# EAGLE board Serial-7-Segment-Shield-Panel-v10 (EAGLE 6.4)
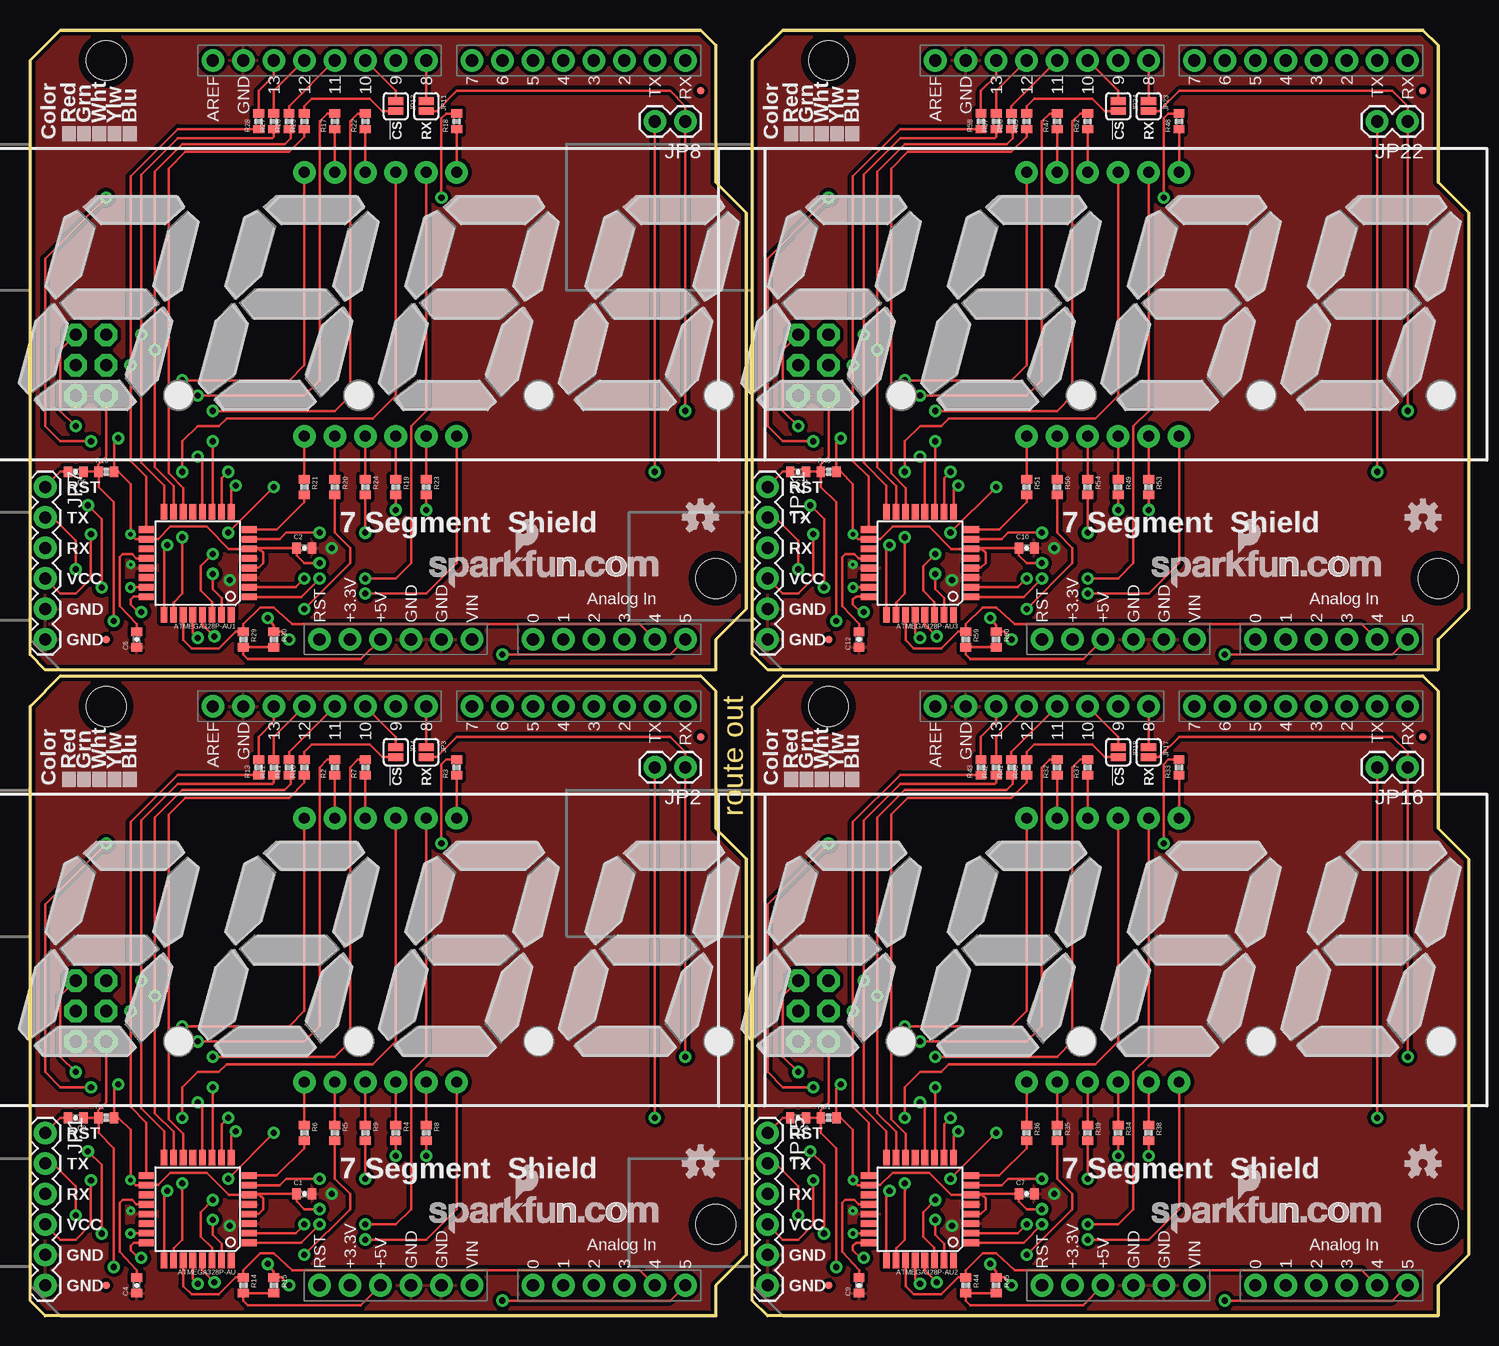
[diagram p0: board, top side]
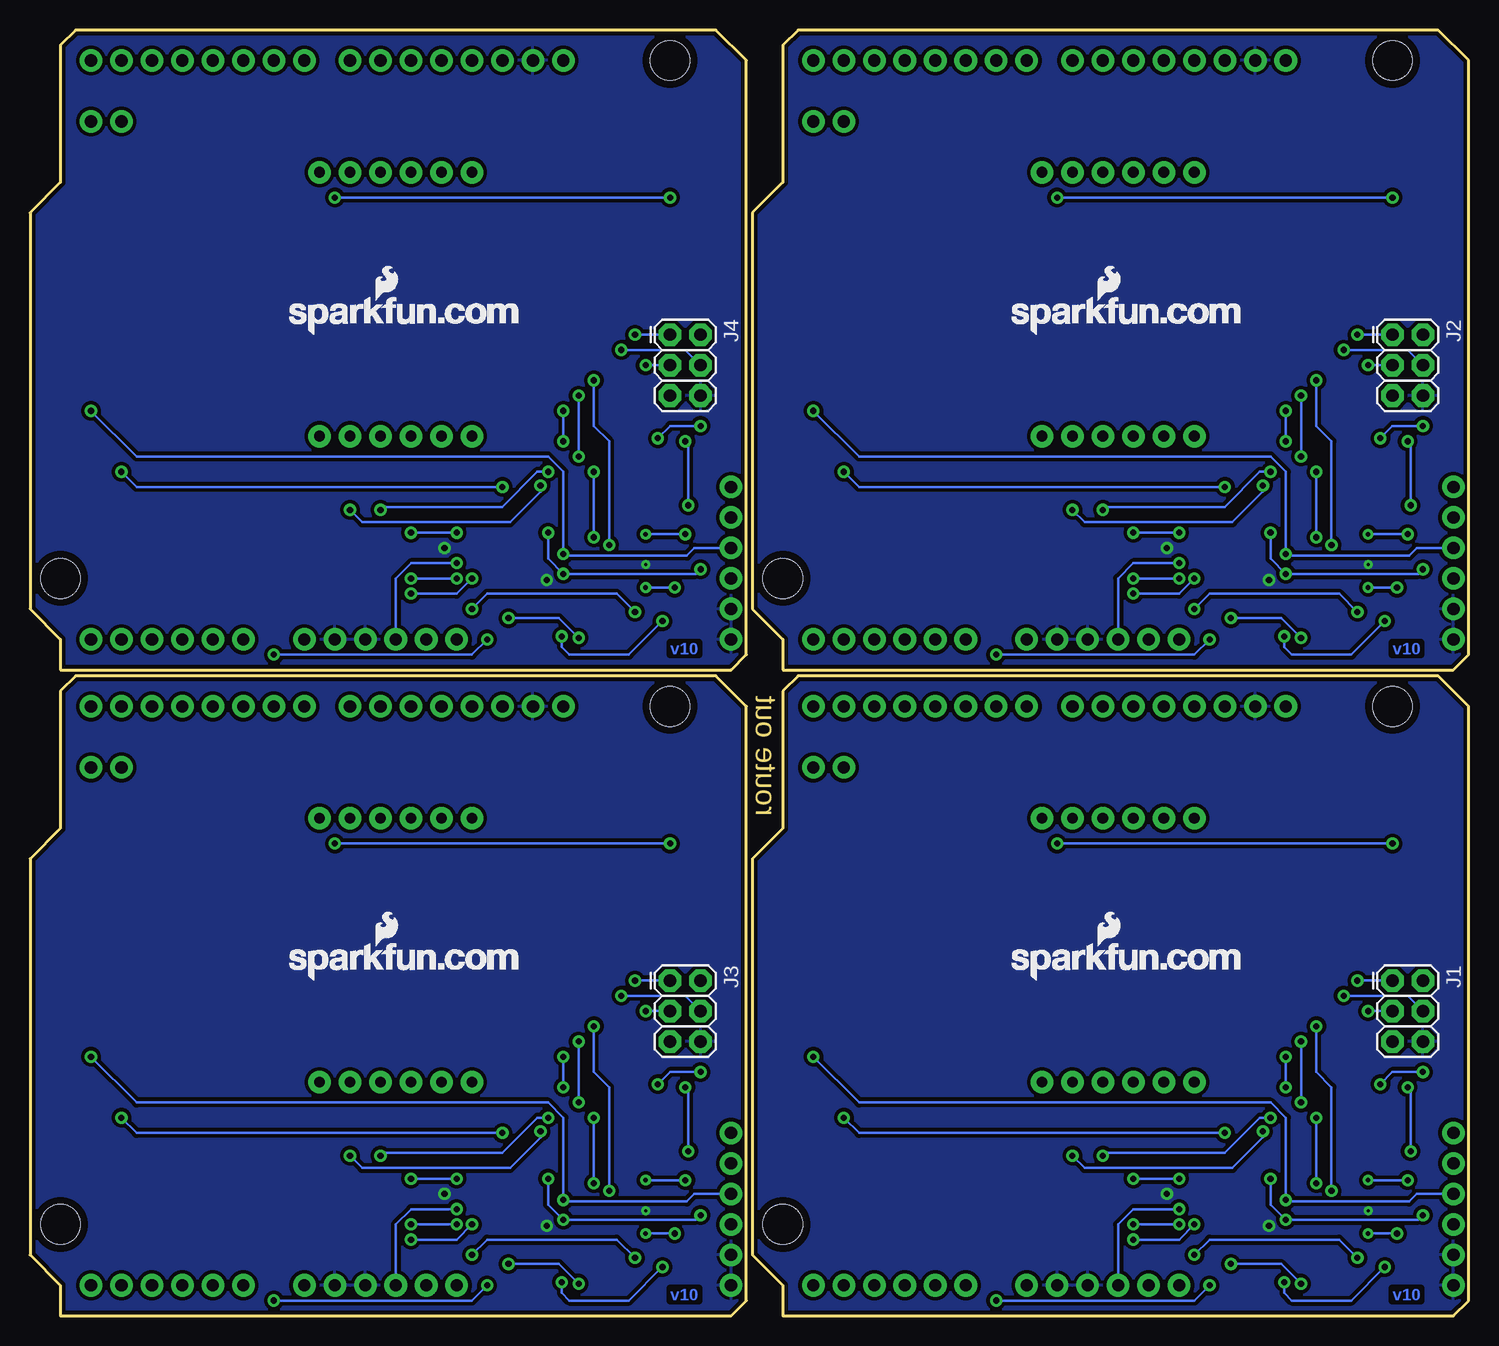
[diagram p1: board, bottom side, seen from below]

Size 119.89 x 107.19 mm. Coordinates in mm from the lower left corner, seen from the top.
Outline: 0,1.27 0,50.8 2.54,53.34 55.88,53.34 57.15,52.07 57.15,40.64 59.69,38.1 59.69,5.08 57.15,2.54 57.15,0 1.27,0 0,1.27
Outline: 0,55.12 0,104.65 2.54,107.19 55.88,107.19 57.15,105.92 57.15,94.49 59.69,91.95 59.69,58.93 57.15,56.39 57.15,53.85 1.27,53.85 0,55.12
Outline: 60.2,1.27 60.2,50.8 62.74,53.34 116.08,53.34 117.35,52.07 117.35,40.64 119.89,38.1 119.89,5.08 117.35,2.54 117.35,0 61.47,0 60.2,1.27
Outline: 60.2,55.12 60.2,104.65 62.74,107.19 116.08,107.19 117.35,105.92 117.35,94.49 119.89,91.95 119.89,58.93 117.35,56.39 117.35,53.85 61.47,53.85 60.2,55.12
Copper layers (1*16): Top 0.035mm / dielectric 1.5mm / Bottom 0.035mm
Design rules "default": minimum track width 8mil, minimum drill 20mil, track to track 8mil, track to pad 8mil, pad to pad 8mil, via to via 8mil, smd to smd 8mil, copper to edge 8mil, drill to drill 8mil, minimum pad ring 12mil, minimum via ring 10mil, stop-mask expansion 4mil, vias tented up to drill 20mil, thermal gap 10mil

## Footprints (pad centres in the part's own frame; a part is rotated, then mirrored left to right if it is on the bottom)
TQFP32-08 = smd 1.27 x 0.559: 1 -4.293,2.8; 2 -4.293,2; 3 -4.293,1.2; 4 -4.293,0.4; 5 -4.293,-0.4; 6 -4.293,-1.2; 7 -4.293,-2; 8 -4.293,-2.8; 17 4.293,-2.8; 18 4.293,-2; 19 4.293,-1.2; 20 4.293,-0.4; 21 4.293,0.4; 22 4.293,1.2; 23 4.293,2; 24 4.293,2.8 | smd 0.559 x 1.27: 9 -2.8,-4.293; 10 -2,-4.293; 11 -1.2,-4.293; 12 -0.4,-4.293; 13 0.4,-4.293; 14 1.2,-4.293; 15 2,-4.293; 16 2.8,-4.293; 25 2.8,4.293; 26 2,4.293; 27 1.2,4.293; 28 0.4,4.293; 29 -0.4,4.293; 30 -1.2,4.293; 31 -2,4.293; 32 -2.8,4.293
0402-CAP = smd 0.7 x 0.9: 1 -0.65,0; 2 0.65,0
2X3 = drill 1.016 pad 1.88 octagon: 1 0,0; 2 0,2.54; 3 2.54,0; 4 2.54,2.54; 5 5.08,0; 6 5.08,2.54
1X06 = drill 1.016 pad 1.88: 1 0,0; 2 2.54,0; 3 5.08,0; 4 7.62,0; 5 10.16,0; 6 12.7,0
1X02 = drill 1.016 pad 1.88: 1 0,0; 2 2.54,0
SJ_2S = smd 0.635 x 1.27: 1 -0.412,0; 2 0.412,0
MICRO-FIDUCIAL = smd 0.635 x 0.635: 1 0,0
0402-RES = smd 0.7 x 0.9: 1 -0.65,0; 2 0.65,0
DUEMILANOVE_SHIELD = drill 1.016 pad 1.88: 3.3V 50.8,26.67; 5V 50.8,29.21; A0 50.8,41.91; A1 50.8,44.45; A2 50.8,46.99; A3 50.8,49.53; A4 50.8,52.07; A5 50.8,54.61; AREF 2.54,15.24; D2 2.54,49.53; D3 2.54,46.99; D4 2.54,44.45; D5 2.54,41.91; D6 2.54,39.37; D7 2.54,36.83; D8 2.54,33.02; D9 2.54,30.48; D10 2.54,27.94; D11 2.54,25.4; D12 2.54,22.86; D13 2.54,20.32; GND@0 50.8,31.75; GND@1 50.8,34.29; GND@2 2.54,17.78; RES 50.8,24.13; RX 2.54,54.61; TX 2.54,52.07; VIN 50.8,36.83 | hole 3.302: 45.72,57.15; 2.54,6.35
7-SEGMENT-4DIGIT-COUNTER = drill 0.9 pad 1.88: 1 -6.35,-10.998; 2 -3.81,-10.998; 3 -1.27,-10.998; 4 1.27,-10.998; 5 3.81,-10.998; 6 6.35,-10.998; 7 6.35,10.998; 8 3.81,10.998; 9 1.27,10.998; 10 -1.27,10.998; 11 -3.81,10.998; 12 -6.35,10.998

## Placement (x,y rotation side)
ATMEGA328P-AU  ATMEGA328P-AU  [TQFP32-08]  13.97,8.89 180 top
ATMEGA328P-AU1  ATMEGA328P-AU  [TQFP32-08]  13.97,62.74 180 top
ATMEGA328P-AU2  ATMEGA328P-AU  [TQFP32-08]  74.17,8.89 180 top
ATMEGA328P-AU3  ATMEGA328P-AU  [TQFP32-08]  74.17,62.74 180 top
C1  0.1uF  [0402-CAP]  22.86,10.16 0 top
C2  0.1uF  [0402-CAP]  22.86,64.01 0 top
C3  0.1uF  [0402-CAP]  3.81,16.51 180 top
C4  0.1uF  [0402-CAP]  8.89,2.54 90 top
C5  0.1uF  [0402-CAP]  3.81,70.36 180 top
C6  0.1uF  [0402-CAP]  8.89,56.39 90 top
C7  0.1uF  [0402-CAP]  83.06,10.16 0 top
C8  0.1uF  [0402-CAP]  64.01,16.51 180 top
C9  0.1uF  [0402-CAP]  69.09,2.54 90 top
C10  0.1uF  [0402-CAP]  83.06,64.01 0 top
C11  0.1uF  [0402-CAP]  64.01,70.36 180 top
C12  0.1uF  [0402-CAP]  69.09,56.39 90 top
J1  AVR_SPI_PRG_6PTH  [2X3]  6.35,27.94 270 bottom
J2  AVR_SPI_PRG_6PTH  [2X3]  6.35,81.79 270 bottom
J3  AVR_SPI_PRG_6PTH  [2X3]  66.55,27.94 270 bottom
J4  AVR_SPI_PRG_6PTH  [2X3]  66.55,81.79 270 bottom
JP1  [1X06]  1.27,15.24 270 top
JP2  [1X02]  54.61,45.72 180 top
JP3  NC  [SJ_2S]  33.02,46.99 270 top
JP4  NC  [SJ_2S]  30.48,46.99 270 top
JP5  FIDUCIALUFIDUCIAL  [MICRO-FIDUCIAL]  55.88,102.11 0 top
JP6  FIDUCIALUFIDUCIAL  [MICRO-FIDUCIAL]  6.35,56.39 0 top
JP7  [1X06]  1.27,69.09 270 top
JP8  [1X02]  54.61,99.57 180 top
JP9  FIDUCIALUFIDUCIAL  [MICRO-FIDUCIAL]  55.88,48.26 0 top
JP10  FIDUCIALUFIDUCIAL  [MICRO-FIDUCIAL]  6.35,2.54 0 top
JP11  NC  [SJ_2S]  33.02,100.84 270 top
JP12  NC  [SJ_2S]  30.48,100.84 270 top
JP13  FIDUCIALUFIDUCIAL  [MICRO-FIDUCIAL]  116.08,48.26 0 top
JP14  FIDUCIALUFIDUCIAL  [MICRO-FIDUCIAL]  66.55,2.54 0 top
JP15  [1X06]  61.47,15.24 270 top
JP16  [1X02]  114.81,45.72 180 top
JP17  NC  [SJ_2S]  93.22,46.99 270 top
JP18  NC  [SJ_2S]  90.68,46.99 270 top
JP19  FIDUCIALUFIDUCIAL  [MICRO-FIDUCIAL]  116.08,102.11 0 top
JP20  FIDUCIALUFIDUCIAL  [MICRO-FIDUCIAL]  66.55,56.39 0 top
JP21  [1X06]  61.47,69.09 270 top
JP22  [1X02]  114.81,99.57 180 top
JP23  NC  [SJ_2S]  93.22,100.84 270 top
JP24  NC  [SJ_2S]  90.68,100.84 270 top
LOGO1  LOGO-SFENEW  [SFE-NEW-WEBLOGO]  33.27,6.86 0 top
LOGO2  LOGO-SFENEW  [SFE-NEW-WEBLOGO]  38.1,27.94 0 bottom
LOGO3  LOGO-SFENEW  [SFE-NEW-WEBLOGO]  33.27,60.71 0 top
LOGO4  LOGO-SFENEW  [SFE-NEW-WEBLOGO]  38.1,81.79 0 bottom
LOGO5  LOGO-SFENEW  [SFE-NEW-WEBLOGO]  93.47,6.86 0 top
LOGO6  LOGO-SFENEW  [SFE-NEW-WEBLOGO]  98.3,27.94 0 bottom
LOGO7  LOGO-SFENEW  [SFE-NEW-WEBLOGO]  93.47,60.71 0 top
LOGO8  LOGO-SFENEW  [SFE-NEW-WEBLOGO]  98.3,81.79 0 bottom
R1  10k  [0402-RES]  6.35,16.51 0 top
R2  100  [0402-RES]  25.4,45.72 90 top
R3  100  [0402-RES]  35.56,45.72 90 top
R4  100  [0402-RES]  30.48,15.24 270 top
R5  100  [0402-RES]  25.4,15.24 270 top
R6  100  [0402-RES]  22.86,15.24 270 top
R7  100  [0402-RES]  27.94,45.72 90 top
R8  100  [0402-RES]  33.02,15.24 270 top
R9  100  [0402-RES]  27.94,15.24 270 top
R10  1k  [0402-RES]  22.86,45.72 90 top
R11  1k  [0402-RES]  21.59,45.72 90 top
R12  1k  [0402-RES]  20.32,45.72 90 top
R13  1k  [0402-RES]  19.05,45.72 90 top
R14  10k  [0402-RES]  17.78,2.54 270 top
R15  10k  [0402-RES]  20.32,2.54 270 top
R16  10k  [0402-RES]  6.35,70.36 0 top
R17  100  [0402-RES]  25.4,99.57 90 top
R18  100  [0402-RES]  35.56,99.57 90 top
R19  100  [0402-RES]  30.48,69.09 270 top
R20  100  [0402-RES]  25.4,69.09 270 top
R21  100  [0402-RES]  22.86,69.09 270 top
R22  100  [0402-RES]  27.94,99.57 90 top
R23  100  [0402-RES]  33.02,69.09 270 top
R24  100  [0402-RES]  27.94,69.09 270 top
R25  1k  [0402-RES]  22.86,99.57 90 top
R26  1k  [0402-RES]  21.59,99.57 90 top
R27  1k  [0402-RES]  20.32,99.57 90 top
R28  1k  [0402-RES]  19.05,99.57 90 top
R29  10k  [0402-RES]  17.78,56.39 270 top
R30  10k  [0402-RES]  20.32,56.39 270 top
R31  10k  [0402-RES]  66.55,16.51 0 top
R32  100  [0402-RES]  85.6,45.72 90 top
R33  100  [0402-RES]  95.76,45.72 90 top
R34  100  [0402-RES]  90.68,15.24 270 top
R35  100  [0402-RES]  85.6,15.24 270 top
R36  100  [0402-RES]  83.06,15.24 270 top
R37  100  [0402-RES]  88.14,45.72 90 top
R38  100  [0402-RES]  93.22,15.24 270 top
R39  100  [0402-RES]  88.14,15.24 270 top
R40  1k  [0402-RES]  83.06,45.72 90 top
R41  1k  [0402-RES]  81.79,45.72 90 top
R42  1k  [0402-RES]  80.52,45.72 90 top
R43  1k  [0402-RES]  79.25,45.72 90 top
R44  10k  [0402-RES]  77.98,2.54 270 top
R45  10k  [0402-RES]  80.52,2.54 270 top
R46  10k  [0402-RES]  66.55,70.36 0 top
R47  100  [0402-RES]  85.6,99.57 90 top
R48  100  [0402-RES]  95.76,99.57 90 top
R49  100  [0402-RES]  90.68,69.09 270 top
R50  100  [0402-RES]  85.6,69.09 270 top
R51  100  [0402-RES]  83.06,69.09 270 top
R52  100  [0402-RES]  88.14,99.57 90 top
R53  100  [0402-RES]  93.22,69.09 270 top
R54  100  [0402-RES]  88.14,69.09 270 top
R55  1k  [0402-RES]  83.06,99.57 90 top
R56  1k  [0402-RES]  81.79,99.57 90 top
R57  1k  [0402-RES]  80.52,99.57 90 top
R58  1k  [0402-RES]  79.25,99.57 90 top
R59  10k  [0402-RES]  77.98,56.39 270 top
R60  10k  [0402-RES]  80.52,56.39 270 top
U1  ARDUINO_SHIELDLABEL  [DUEMILANOVE_SHIELD]  0,53.34 270 top
U2  ARDUINO_SHIELDLABEL  [DUEMILANOVE_SHIELD]  0,107.19 270 top
U3  ARDUINO_SHIELDLABEL  [DUEMILANOVE_SHIELD]  60.2,53.34 270 top
U4  ARDUINO_SHIELDLABEL  [DUEMILANOVE_SHIELD]  60.2,107.19 270 top
U$1  7-SEGMENT-4DIGIT-COUNTERPTH  [7-SEGMENT-4DIGIT-COUNTER]  29.21,30.48 0 top
U$2  OSHW-LOGOS  [OSHW-LOGO-S]  55.88,66.55 0 top
U$3  7-SEGMENT-4DIGIT-COUNTERPTH  [7-SEGMENT-4DIGIT-COUNTER]  29.21,84.33 0 top
U$4  OSHW-LOGOS  [OSHW-LOGO-S]  55.88,12.7 0 top
U$5  OSHW-LOGOS  [OSHW-LOGO-S]  116.08,12.7 0 top
U$6  7-SEGMENT-4DIGIT-COUNTERPTH  [7-SEGMENT-4DIGIT-COUNTER]  89.41,30.48 0 top
U$7  OSHW-LOGOS  [OSHW-LOGO-S]  116.08,66.55 0 top
U$8  7-SEGMENT-4DIGIT-COUNTERPTH  [7-SEGMENT-4DIGIT-COUNTER]  89.41,84.33 0 top

## Library data of the parts
ATMEGA328P-AU ATMEGA328P-AU1-ATMEGA328P-AU3 C1 C2 C7 C10 JP5 JP6 JP9 JP10 JP13 JP14 JP19 JP20 R1-R60 = SparkFun
C3-C6 C8 C9 C11 C12 JP3 JP4 JP11 JP12 JP17 JP18 JP23 JP24 = SparkFun-Passives
J1-J4 JP1 JP2 JP7 JP8 JP15 JP16 JP21 JP22 = SparkFun-Connectors
LOGO1-LOGO8 U$2 U$4 U$5 U$7 = SparkFun-Aesthetics
U1-U4 = SparkFun-Boards
U$1 U$3 U$6 U$8 = SparkFun-Displays

## Nets
!SS: ATMEGA328P-AU.14 R10.1
!SS1: ATMEGA328P-AU1.14 R25.1
!SS2: ATMEGA328P-AU2.14 R40.1
!SS3: ATMEGA328P-AU3.14 R55.1
A: ATMEGA328P-AU.12 R2.2
A1: ATMEGA328P-AU1.12 R17.2
A2: ATMEGA328P-AU2.12 R32.2
A3: ATMEGA328P-AU3.12 R47.2
ADC1: ATMEGA328P-AU1.19
ADC2: ATMEGA328P-AU1.22
ADC3: ATMEGA328P-AU2.19
ADC4: ATMEGA328P-AU2.22
ADC5: ATMEGA328P-AU3.19
ADC6: ATMEGA328P-AU.19
ADC7: ATMEGA328P-AU.22
ADC8: ATMEGA328P-AU3.22
B: ATMEGA328P-AU.23 R3.2
B1: ATMEGA328P-AU1.23 R18.2
B2: ATMEGA328P-AU2.23 R33.2
B3: ATMEGA328P-AU3.23 R48.2
C: ATMEGA328P-AU.10 R4.2
C1: ATMEGA328P-AU1.10 R19.2
C2: ATMEGA328P-AU2.10 R34.2
C3: ATMEGA328P-AU3.10 R49.2
D: ATMEGA328P-AU.24 R5.2
D1: ATMEGA328P-AU1.24 R20.2
D2: ATMEGA328P-AU2.24 R35.2
D3: ATMEGA328P-AU3.24 R50.2
DIG1: ATMEGA328P-AU.25 U$1.12
DIG2: ATMEGA328P-AU.26 U$1.9
DIG3: ATMEGA328P-AU.1 U$1.8
DIG4: ATMEGA328P-AU.2 U$1.6
DIG5: ATMEGA328P-AU1.2 U$3.6
DIG6: ATMEGA328P-AU1.1 U$3.8
DIG7: ATMEGA328P-AU1.26 U$3.9
DIG8: ATMEGA328P-AU1.25 U$3.12
DIG9: ATMEGA328P-AU2.2 U$6.6
DIG10: ATMEGA328P-AU2.1 U$6.8
DIG11: ATMEGA328P-AU2.26 U$6.9
DIG12: ATMEGA328P-AU2.25 U$6.12
DIG13: ATMEGA328P-AU3.2 U$8.6
DIG14: ATMEGA328P-AU3.1 U$8.8
DIG15: ATMEGA328P-AU3.26 U$8.9
DIG16: ATMEGA328P-AU3.25 U$8.12
DP: ATMEGA328P-AU.7 R9.2
DP1: ATMEGA328P-AU1.7 R24.2
DP2: ATMEGA328P-AU2.7 R39.2
DP3: ATMEGA328P-AU3.7 R54.2
E: ATMEGA328P-AU.8 R6.2
E1: ATMEGA328P-AU1.8 R21.2
E2: ATMEGA328P-AU2.8 R36.2
E3: ATMEGA328P-AU3.8 R51.2
F: ATMEGA328P-AU.11 R7.2
F1: ATMEGA328P-AU1.11 R22.2
F2: ATMEGA328P-AU2.11 R37.2
F3: ATMEGA328P-AU3.11 R52.2
G: ATMEGA328P-AU.9 R8.2
G1: ATMEGA328P-AU1.9 R23.2
G2: ATMEGA328P-AU2.9 R38.2
G3: ATMEGA328P-AU3.9 R53.2
GND: ATMEGA328P-AU.3 ATMEGA328P-AU.5 ATMEGA328P-AU.21 C1.2 C4.1 J1.6 JP1.5 JP1.6 U1.GND@0 U1.GND@1 U1.GND@2
GND1: ATMEGA328P-AU1.3 ATMEGA328P-AU1.5 ATMEGA328P-AU1.21 C2.2 C6.1 J2.6 JP7.5 JP7.6 U2.GND@0 U2.GND@1 U2.GND@2
GND2: ATMEGA328P-AU2.3 ATMEGA328P-AU2.5 ATMEGA328P-AU2.21 C7.2 C9.1 J3.6 JP15.5 JP15.6 U3.GND@0 U3.GND@1 U3.GND@2
GND3: ATMEGA328P-AU3.3 ATMEGA328P-AU3.5 ATMEGA328P-AU3.21 C10.2 C12.1 J4.6 JP21.5 JP21.6 U4.GND@0 U4.GND@1 U4.GND@2
MISO: ATMEGA328P-AU.16 J1.1 R12.1
MISO1: ATMEGA328P-AU1.16 J2.1 R27.1
MISO2: ATMEGA328P-AU2.16 J3.1 R42.1
MISO3: ATMEGA328P-AU3.16 J4.1 R57.1
MOSI: ATMEGA328P-AU.15 J1.4 R11.1
MOSI1: ATMEGA328P-AU1.15 J2.4 R26.1
MOSI2: ATMEGA328P-AU2.15 J3.4 R41.1
MOSI3: ATMEGA328P-AU3.15 J4.4 R56.1
N$1: ATMEGA328P-AU.20 C4.2
N$2: R13.2 U1.D13
N$3: R12.2 U1.D12
N$4: R11.2 U1.D11
N$5: JP4.2 R10.2
N$6: JP4.1 U1.D10
N$7: JP3.1 U1.D8
N$8: C5.2 JP7.1
N$9: ATMEGA328P-AU1.20 C6.2
N$10: R17.1 U$3.11
N$11: R2.1 U$1.11
N$12: R3.1 U$1.7
N$13: C3.2 JP1.1
N$14: R4.1 U$1.4
N$15: R5.1 U$1.2
N$16: R6.1 U$1.1
N$17: R7.1 U$1.10
N$18: R8.1 U$1.5
N$19: R9.1 U$1.3
N$20: R18.1 U$3.7
N$21: R19.1 U$3.4
N$22: R20.1 U$3.2
N$23: R21.1 U$3.1
N$24: R22.1 U$3.10
N$25: R23.1 U$3.5
N$26: R24.1 U$3.3
N$27: R28.2 U2.D13
N$28: R27.2 U2.D12
N$29: R26.2 U2.D11
N$30: JP12.2 R25.2
N$31: JP12.1 U2.D10
N$32: JP11.1 U2.D8
N$33: C8.2 JP15.1
N$34: ATMEGA328P-AU2.20 C9.2
N$35: R32.1 U$6.11
N$36: R33.1 U$6.7
N$37: R34.1 U$6.4
N$38: R35.1 U$6.2
N$39: R36.1 U$6.1
N$40: R37.1 U$6.10
N$41: R38.1 U$6.5
N$42: R39.1 U$6.3
N$43: R43.2 U3.D13
N$44: R42.2 U3.D12
N$45: R41.2 U3.D11
N$46: JP18.2 R40.2
N$47: JP18.1 U3.D10
N$48: JP17.1 U3.D8
N$49: C11.2 JP21.1
N$50: ATMEGA328P-AU3.20 C12.2
N$51: R47.1 U$8.11
N$52: R48.1 U$8.7
N$53: R49.1 U$8.4
N$54: R50.1 U$8.2
N$55: R51.1 U$8.1
N$56: R52.1 U$8.10
N$57: R53.1 U$8.5
N$58: R54.1 U$8.3
N$59: R58.2 U4.D13
N$60: R57.2 U4.D12
N$61: R56.2 U4.D11
N$62: JP24.2 R55.2
N$63: JP24.1 U4.D10
N$64: JP23.1 U4.D8
RESET: ATMEGA328P-AU.29 C3.1 J1.5 R1.1
RESET1: ATMEGA328P-AU1.29 C5.1 J2.5 R16.1
RESET2: ATMEGA328P-AU2.29 C8.1 J3.5 R31.1
RESET3: ATMEGA328P-AU3.29 C11.1 J4.5 R46.1
RX: ATMEGA328P-AU.30 JP1.3 JP2.1 JP3.2
RX1: ATMEGA328P-AU1.30 JP7.3 JP8.1 JP11.2
RX2: ATMEGA328P-AU2.30 JP15.3 JP16.1 JP17.2
RX3: ATMEGA328P-AU3.30 JP21.3 JP22.1 JP23.2
SCK: ATMEGA328P-AU.17 J1.3 R13.1
SCK1: ATMEGA328P-AU1.17 J2.3 R28.1
SCK2: ATMEGA328P-AU2.17 J3.3 R43.1
SCK3: ATMEGA328P-AU3.17 J4.3 R58.1
SCL: ATMEGA328P-AU.28 R15.1 U1.A5
SCL1: ATMEGA328P-AU1.28 R30.1 U2.A5
SCL2: ATMEGA328P-AU2.28 R45.1 U3.A5
SCL3: ATMEGA328P-AU3.28 R60.1 U4.A5
SDA: ATMEGA328P-AU.27 R14.1 U1.A4
SDA1: ATMEGA328P-AU1.27 R29.1 U2.A4
SDA2: ATMEGA328P-AU2.27 R44.1 U3.A4
SDA3: ATMEGA328P-AU3.27 R59.1 U4.A4
TX: ATMEGA328P-AU.31 JP1.2 JP2.2
TX1: ATMEGA328P-AU1.31 JP7.2 JP8.2
TX2: ATMEGA328P-AU2.31 JP15.2 JP16.2
TX3: ATMEGA328P-AU3.31 JP21.2 JP22.2
VCC: ATMEGA328P-AU.4 ATMEGA328P-AU.6 ATMEGA328P-AU.18 C1.1 J1.2 JP1.4 R1.2 R14.2 R15.2 U1.5V
VCC1: ATMEGA328P-AU1.4 ATMEGA328P-AU1.6 ATMEGA328P-AU1.18 C2.1 J2.2 JP7.4 R16.2 R29.2 R30.2 U2.5V
VCC2: ATMEGA328P-AU2.4 ATMEGA328P-AU2.6 ATMEGA328P-AU2.18 C7.1 J3.2 JP15.4 R31.2 R44.2 R45.2 U3.5V
VCC3: ATMEGA328P-AU3.4 ATMEGA328P-AU3.6 ATMEGA328P-AU3.18 C10.1 J4.2 JP21.4 R46.2 R59.2 R60.2 U4.5V

## Tracks (layer width: path | path; a pad name or v marks a point on that pad's centre or on a via)
!SS
  Top 0.203: ATMEGA328P-AU.14 12.77,15.17 11.56,16.38 11.56,41.78 12.95,43.18 21.59,43.18 22.86,44.45 R10.1
!SS1
  Top 0.203: ATMEGA328P-AU1.14 12.77,69.02 11.56,70.23 11.56,95.63 12.95,97.03 21.59,97.03 22.86,98.3 R25.1
!SS2
  Top 0.203: ATMEGA328P-AU2.14 72.97,15.17 71.75,16.38 71.75,41.78 73.15,43.18 81.79,43.18 83.06,44.45 R40.1
!SS3
  Top 0.203: ATMEGA328P-AU3.14 72.97,69.02 71.75,70.23 71.75,95.63 73.15,97.03 81.79,97.03 83.06,98.3 R55.1
A  (via drill 0.51)
  Top 0.203: R2.2 24.78,46.37 24.13,45.72 24.13,24.13 22.86,22.86 v13.97,22.86 | v13.97,17.78 14.37,17.38 ATMEGA328P-AU.12
  Bottom 0.203: v13.97,22.86 v13.97,17.78
A1  (via drill 0.51)
  Top 0.203: R17.2 24.78,100.22 24.13,99.57 24.13,77.98 22.86,76.71 v13.97,76.71 | v13.97,71.63 14.37,71.23 ATMEGA328P-AU1.12
  Bottom 0.203: v13.97,76.71 v13.97,71.63
A2  (via drill 0.51)
  Top 0.203: R32.2 84.98,46.37 84.33,45.72 84.33,24.13 83.06,22.86 v74.17,22.86 | v74.17,17.78 74.57,17.38 ATMEGA328P-AU2.12
  Bottom 0.203: v74.17,22.86 v74.17,17.78
A3  (via drill 0.51)
  Top 0.203: R47.2 84.98,100.22 84.33,99.57 84.33,77.98 83.06,76.71 v74.17,76.71 | v74.17,71.63 74.57,71.23 ATMEGA328P-AU3.12
  Bottom 0.203: v74.17,76.71 v74.17,71.63
B  (via drill 0.38, 0.51)
  Top 0.203: ATMEGA328P-AU.23 8.41,6.89 v8.38,6.86 | v5.97,6.86 5.97,12.57 v4.83,13.72 | v6.35,39.37 5.08,38.1 1.27,34.29 1.27,20.32 2.54,19.05 v5.08,19.05 | v34.29,39.37 34.29,45.97 34.67,46.35 35.55,46.35 R3.2
  Bottom 0.203: v8.38,6.86 v5.97,6.86 | v4.83,13.72 4.83,18.8 v5.08,19.05 | v6.35,39.37 v34.29,39.37
B1  (via drill 0.38, 0.51)
  Top 0.203: ATMEGA328P-AU1.23 8.41,60.74 v8.38,60.71 | v5.97,60.71 5.97,66.42 v4.83,67.56 | v6.35,93.22 5.08,91.95 1.27,88.14 1.27,74.17 2.54,72.9 v5.08,72.9 | v34.29,93.22 34.29,99.82 34.67,100.2 35.55,100.2 R18.2
  Bottom 0.203: v8.38,60.71 v5.97,60.71 | v4.83,67.56 4.83,72.64 v5.08,72.9 | v6.35,93.22 v34.29,93.22
B2  (via drill 0.38, 0.51)
  Top 0.203: ATMEGA328P-AU2.23 68.61,6.89 v68.58,6.86 | v66.17,6.86 66.17,12.57 v65.02,13.72 | v66.55,39.37 65.28,38.1 61.47,34.29 61.47,20.32 62.74,19.05 v65.28,19.05 | v94.49,39.37 94.49,45.97 94.87,46.35 95.74,46.35 R33.2
  Bottom 0.203: v68.58,6.86 v66.17,6.86 | v65.02,13.72 65.02,18.8 v65.28,19.05 | v66.55,39.37 v94.49,39.37
B3  (via drill 0.38, 0.51)
  Top 0.203: ATMEGA328P-AU3.23 68.61,60.74 v68.58,60.71 | v66.17,60.71 66.17,66.42 v65.02,67.56 | v66.55,93.22 65.28,91.95 61.47,88.14 61.47,74.17 62.74,72.9 v65.28,72.9 | v94.49,93.22 94.49,99.82 94.87,100.2 95.74,100.2 R48.2
  Bottom 0.203: v68.58,60.71 v66.17,60.71 | v65.02,67.56 65.02,72.64 v65.28,72.9 | v66.55,93.22 v94.49,93.22
C  (via drill 0.51)
  Top 0.203: R4.2 v30.48,13.34 | v16.51,16.51 15.97,15.97 ATMEGA328P-AU.10
  Bottom 0.203: v30.48,13.34 30.23,13.59 20.32,13.59 17.4,16.51 v16.51,16.51
C1  (via drill 0.51)
  Top 0.203: R19.2 v30.48,67.18 | v16.51,70.36 15.97,69.82 ATMEGA328P-AU1.10
  Bottom 0.203: v30.48,67.18 30.23,67.44 20.32,67.44 17.4,70.36 v16.51,70.36
C2  (via drill 0.51)
  Top 0.203: R34.2 v90.68,13.34 | v76.71,16.51 76.17,15.97 ATMEGA328P-AU2.10
  Bottom 0.203: v90.68,13.34 90.42,13.59 80.52,13.59 77.6,16.51 v76.71,16.51
C3  (via drill 0.51)
  Top 0.203: R49.2 v90.68,67.18 | v76.71,70.36 76.17,69.82 ATMEGA328P-AU3.10
  Bottom 0.203: v90.68,67.18 90.42,67.44 80.52,67.44 77.6,70.36 v76.71,70.36
D  (via drill 0.51)
  Top 0.203: v22.86,5.08 26.67,8.89 26.67,10.16 25.4,11.43 R5.2 | v9.27,4.83 9.02,4.83 8.38,5.46 8.38,5.84 8.64,6.1 ATMEGA328P-AU.24
  Bottom 0.203: v22.86,5.08 21.59,6.35 10.79,6.35 v9.27,4.83
D1  (via drill 0.51)
  Top 0.203: v22.86,58.93 26.67,62.74 26.67,64.01 25.4,65.28 R20.2 | v9.27,58.67 9.02,58.67 8.38,59.31 8.38,59.69 8.64,59.94 ATMEGA328P-AU1.24
  Bottom 0.203: v22.86,58.93 21.59,60.2 10.79,60.2 v9.27,58.67
D2  (via drill 0.51)
  Top 0.203: v83.06,5.08 86.87,8.89 86.87,10.16 85.6,11.43 R35.2 | v69.47,4.83 69.22,4.83 68.58,5.46 68.58,5.84 68.83,6.1 ATMEGA328P-AU2.24
  Bottom 0.203: v83.06,5.08 81.79,6.35 70.99,6.35 v69.47,4.83
D3  (via drill 0.51)
  Top 0.203: v83.06,58.93 86.87,62.74 86.87,64.01 85.6,65.28 R50.2 | v69.47,58.67 69.22,58.67 68.58,59.31 68.58,59.69 68.83,59.94 ATMEGA328P-AU3.24
  Bottom 0.203: v83.06,58.93 81.79,60.2 70.99,60.2 v69.47,58.67
DIG1  (via drill 0.51)
  Top 0.203: U$1.12 22.86,25.4 21.59,24.13 v12.7,24.13 | ATMEGA328P-AU.25 11.17,10.15 v11.43,10.41
  Bottom 0.203: v11.43,10.41 11.43,19.05 12.7,20.32 v12.7,24.13
DIG2  (via drill 0.51)
  Top 0.203: U$1.9 30.48,22.86 28.57,20.95 16.38,20.95 15.75,20.32 13.97,20.32 12.7,19.05 v12.7,16.51 | v12.7,11.05 12.7,6.35 11.97,5.62 ATMEGA328P-AU.26
  Bottom 0.203: v12.7,16.51 v12.7,11.05
DIG3  (via drill 0.51)
  Top 0.203: U$1.8 33.02,21.59 31.75,20.32 31.75,8.89 30.48,7.62 v27.94,7.62 | v24.13,7.62 22.6,6.09 ATMEGA328P-AU.1
  Bottom 0.203: v27.94,7.62 v24.13,7.62
DIG4  (via drill 0.51)
  Top 0.203: U$1.6 35.56,8.89 33.02,6.35 v27.94,6.35 | v22.86,7.62 22.13,6.89 ATMEGA328P-AU.2
  Bottom 0.203: v22.86,7.62 24.13,6.35 v27.94,6.35
DIG5  (via drill 0.51)
  Top 0.203: U$3.6 35.56,62.74 33.02,60.2 v27.94,60.2 | v22.86,61.47 22.13,60.74 ATMEGA328P-AU1.2
  Bottom 0.203: v22.86,61.47 24.13,60.2 v27.94,60.2
DIG6  (via drill 0.51)
  Top 0.203: U$3.8 33.02,75.44 31.75,74.17 31.75,62.74 30.48,61.47 v27.94,61.47 | v24.13,61.47 22.6,59.94 ATMEGA328P-AU1.1
  Bottom 0.203: v27.94,61.47 v24.13,61.47
DIG7  (via drill 0.51)
  Top 0.203: U$3.9 30.48,76.71 28.57,74.8 16.38,74.8 15.75,74.17 13.97,74.17 12.7,72.9 v12.7,70.36 | v12.7,64.9 12.7,60.2 11.97,59.47 ATMEGA328P-AU1.26
  Bottom 0.203: v12.7,70.36 v12.7,64.9
DIG8  (via drill 0.51)
  Top 0.203: U$3.12 22.86,79.25 21.59,77.98 v12.7,77.98 | ATMEGA328P-AU1.25 11.17,64 v11.43,64.26
  Bottom 0.203: v11.43,64.26 11.43,72.9 12.7,74.17 v12.7,77.98
DIG9  (via drill 0.51)
  Top 0.203: U$6.6 95.76,8.89 93.22,6.35 v88.14,6.35 | v83.06,7.62 82.33,6.89 ATMEGA328P-AU2.2
  Bottom 0.203: v83.06,7.62 84.33,6.35 v88.14,6.35
DIG10  (via drill 0.51)
  Top 0.203: U$6.8 93.22,21.59 91.95,20.32 91.95,8.89 90.68,7.62 v88.14,7.62 | v84.33,7.62 82.8,6.09 ATMEGA328P-AU2.1
  Bottom 0.203: v88.14,7.62 v84.33,7.62
DIG11  (via drill 0.51)
  Top 0.203: U$6.9 90.68,22.86 88.77,20.95 76.58,20.95 75.95,20.32 74.17,20.32 72.9,19.05 v72.9,16.51 | v72.9,11.05 72.9,6.35 72.17,5.62 ATMEGA328P-AU2.26
  Bottom 0.203: v72.9,16.51 v72.9,11.05
DIG12  (via drill 0.51)
  Top 0.203: U$6.12 83.06,25.4 81.79,24.13 v72.9,24.13 | ATMEGA328P-AU2.25 71.37,10.15 v71.63,10.41
  Bottom 0.203: v71.63,10.41 71.63,19.05 72.9,20.32 v72.9,24.13
DIG13  (via drill 0.51)
  Top 0.203: U$8.6 95.76,62.74 93.22,60.2 v88.14,60.2 | v83.06,61.47 82.33,60.74 ATMEGA328P-AU3.2
  Bottom 0.203: v83.06,61.47 84.33,60.2 v88.14,60.2
DIG14  (via drill 0.51)
  Top 0.203: U$8.8 93.22,75.44 91.95,74.17 91.95,62.74 90.68,61.47 v88.14,61.47 | v84.33,61.47 82.8,59.94 ATMEGA328P-AU3.1
  Bottom 0.203: v88.14,61.47 v84.33,61.47
DIG15  (via drill 0.51)
  Top 0.203: U$8.9 90.68,76.71 88.77,74.8 76.58,74.8 75.95,74.17 74.17,74.17 72.9,72.9 v72.9,70.36 | v72.9,64.9 72.9,60.2 72.17,59.47 ATMEGA328P-AU3.26
  Bottom 0.203: v72.9,70.36 v72.9,64.9
DIG16  (via drill 0.51)
  Top 0.203: U$8.12 83.06,79.25 81.79,77.98 v72.9,77.98 | ATMEGA328P-AU3.25 71.37,64 v71.63,64.26
  Bottom 0.203: v71.63,64.26 71.63,72.9 72.9,74.17 v72.9,77.98
DP  (via drill 0.51)
  Top 0.203: R9.2 v27.94,11.43 | v24.13,11.43 21.34,11.43 20.8,10.89 ATMEGA328P-AU.7
  Bottom 0.203: v27.94,11.43 v24.13,11.43
DP1  (via drill 0.51)
  Top 0.203: R24.2 v27.94,65.28 | v24.13,65.28 21.34,65.28 20.8,64.74 ATMEGA328P-AU1.7
  Bottom 0.203: v27.94,65.28 v24.13,65.28
DP2  (via drill 0.51)
  Top 0.203: R39.2 v88.14,11.43 | v84.33,11.43 81.53,11.43 80.99,10.89 ATMEGA328P-AU2.7
  Bottom 0.203: v88.14,11.43 v84.33,11.43
DP3  (via drill 0.51)
  Top 0.203: R54.2 v88.14,65.28 | v84.33,65.28 81.53,65.28 80.99,64.74 ATMEGA328P-AU3.7
  Bottom 0.203: v88.14,65.28 v84.33,65.28
E
  Top 0.203: R6.2 22.86,13.97 20.58,11.69 ATMEGA328P-AU.8
E1
  Top 0.203: R21.2 22.86,67.82 20.58,65.54 ATMEGA328P-AU1.8
E2
  Top 0.203: R36.2 83.06,13.97 80.78,11.69 ATMEGA328P-AU2.8
E3
  Top 0.203: R51.2 83.06,67.82 80.78,65.54 ATMEGA328P-AU3.8
F  (via drill 0.51)
  Top 0.203: R7.2 27.32,46.37 26.67,45.72 26.67,22.86 25.4,21.59 v15.24,21.59 | v15.24,19.05 15.24,13.25 ATMEGA328P-AU.11
  Bottom 0.203: v15.24,21.59 v15.24,19.05
F1  (via drill 0.51)
  Top 0.203: R22.2 27.32,100.22 26.67,99.57 26.67,76.71 25.4,75.44 v15.24,75.44 | v15.24,72.9 15.24,67.1 ATMEGA328P-AU1.11
  Bottom 0.203: v15.24,75.44 v15.24,72.9
F2  (via drill 0.51)
  Top 0.203: R37.2 87.52,46.37 86.87,45.72 86.87,22.86 85.6,21.59 v75.44,21.59 | v75.44,19.05 75.44,13.25 ATMEGA328P-AU2.11
  Bottom 0.203: v75.44,21.59 v75.44,19.05
F3  (via drill 0.51)
  Top 0.203: R52.2 87.52,100.22 86.87,99.57 86.87,76.71 85.6,75.44 v75.44,75.44 | v75.44,72.9 75.44,67.1 ATMEGA328P-AU3.11
  Bottom 0.203: v75.44,75.44 v75.44,72.9
G  (via drill 0.51)
  Top 0.203: v17.14,15.37 16.77,14.99 ATMEGA328P-AU.9 | R8.2 v33.02,13.34
  Bottom 0.203: v17.14,15.37 17.14,14.86 19.68,12.32 32,12.32 v33.02,13.34
G1  (via drill 0.51)
  Top 0.203: v17.14,69.22 16.77,68.84 ATMEGA328P-AU1.9 | R23.2 v33.02,67.18
  Bottom 0.203: v17.14,69.22 17.14,68.71 19.68,66.17 32,66.17 v33.02,67.18
G2  (via drill 0.51)
  Top 0.203: v77.34,15.37 76.97,14.99 ATMEGA328P-AU2.9 | R38.2 v93.22,13.34
  Bottom 0.203: v77.34,15.37 77.34,14.86 79.88,12.32 92.2,12.32 v93.22,13.34
G3  (via drill 0.51)
  Top 0.203: v77.34,69.22 76.97,68.84 ATMEGA328P-AU3.9 | R53.2 v93.22,67.18
  Bottom 0.203: v77.34,69.22 77.34,68.71 79.88,66.17 92.2,66.17 v93.22,67.18
GND  (via drill 0.25, 0.51)
  other vias: 25.15,10.16 16.64,7.49 8.38,8.76
  pour Top (isolate 0.305): 0,1.27 0,50.8 2.54,53.34 55.88,53.34 57.15,52.07 57.15,40.64 59.69,38.1 59.69,5.08 57.15,2.54 57.15,0 1.27,0
  pour Bottom (isolate 0.305): 0,1.27 0,50.8 2.54,53.34 55.88,53.34 57.15,52.07 57.15,40.64 59.69,38.1 59.69,5.08 57.15,2.54 57.15,0 1.27,0
GND1  (via drill 0.25, 0.51)
  other vias: 25.15,64.01 16.64,61.34 8.38,62.61
  pour Top (isolate 0.305): 0,55.12 0,104.65 2.54,107.19 55.88,107.19 57.15,105.92 57.15,94.49 59.69,91.95 59.69,58.93 57.15,56.39 57.15,53.85 1.27,53.85
  pour Bottom (isolate 0.305): 0,55.12 0,104.65 2.54,107.19 55.88,107.19 57.15,105.92 57.15,94.49 59.69,91.95 59.69,58.93 57.15,56.39 57.15,53.85 1.27,53.85
GND2  (via drill 0.25, 0.51)
  other vias: 85.34,10.16 76.83,7.49 68.58,8.76
  pour Top (isolate 0.305): 60.2,1.27 60.2,50.8 62.74,53.34 116.08,53.34 117.35,52.07 117.35,40.64 119.89,38.1 119.89,5.08 117.35,2.54 117.35,0 61.47,0
  pour Bottom (isolate 0.305): 60.2,1.27 60.2,50.8 62.74,53.34 116.08,53.34 117.35,52.07 117.35,40.64 119.89,38.1 119.89,5.08 117.35,2.54 117.35,0 61.47,0
GND3  (via drill 0.25, 0.51)
  other vias: 85.34,64.01 76.83,61.34 68.58,62.61
  pour Top (isolate 0.305): 60.2,55.12 60.2,104.65 62.74,107.19 116.08,107.19 117.35,105.92 117.35,94.49 119.89,91.95 119.89,58.93 117.35,56.39 117.35,53.85 61.47,53.85
  pour Bottom (isolate 0.305): 60.2,55.12 60.2,104.65 62.74,107.19 116.08,107.19 117.35,105.92 117.35,94.49 119.89,91.95 119.89,58.93 117.35,56.39 117.35,53.85 61.47,53.85
MISO  (via drill 0.51)
  Top 0.203: ATMEGA328P-AU.16 11.17,15.37 9.27,17.27 v9.27,27.94 9.27,41.27 12.32,44.32 20.19,44.32 20.32,44.45 R12.1
  Bottom 0.203: J1.1 v9.27,27.94
MISO1  (via drill 0.51)
  Top 0.203: ATMEGA328P-AU1.16 11.17,69.22 9.27,71.12 v9.27,81.79 9.27,95.12 12.32,98.17 20.19,98.17 20.32,98.3 R27.1
  Bottom 0.203: J2.1 v9.27,81.79
MISO2  (via drill 0.51)
  Top 0.203: ATMEGA328P-AU2.16 71.37,15.37 69.47,17.27 v69.47,27.94 69.47,41.27 72.52,44.32 80.39,44.32 80.52,44.45 R42.1
  Bottom 0.203: J3.1 v69.47,27.94
MISO3  (via drill 0.51)
  Top 0.203: ATMEGA328P-AU3.16 71.37,69.22 69.47,71.12 v69.47,81.79 69.47,95.12 72.52,98.17 80.39,98.17 80.52,98.3 R57.1
  Bottom 0.203: J4.1 v69.47,81.79
MOSI  (via drill 0.51)
  Top 0.203: ATMEGA328P-AU.15 11.97,15.34 10.41,16.89 v10.41,26.67 10.41,41.53 12.7,43.81 13.84,43.81 21.21,43.81 21.72,44.32 21.72,44.94 R11.1
  Bottom 0.203: J1.4 5.08,26.67 v10.41,26.67
MOSI1  (via drill 0.51)
  Top 0.203: ATMEGA328P-AU1.15 11.97,69.18 10.41,70.74 v10.41,80.52 10.41,95.38 12.7,97.66 13.84,97.66 21.21,97.66 21.72,98.17 21.72,98.79 R26.1
  Bottom 0.203: J2.4 5.08,80.52 v10.41,80.52
MOSI2  (via drill 0.51)
  Top 0.203: ATMEGA328P-AU2.15 72.17,15.34 70.61,16.89 v70.61,26.67 70.61,41.53 72.9,43.81 74.04,43.81 81.41,43.81 81.92,44.32 81.92,44.94 R41.1
  Bottom 0.203: J3.4 65.28,26.67 v70.61,26.67
MOSI3  (via drill 0.51)
  Top 0.203: ATMEGA328P-AU3.15 72.17,69.18 70.61,70.74 v70.61,80.52 70.61,95.38 72.9,97.66 74.04,97.66 81.41,97.66 81.92,98.17 81.92,98.79 R56.1
  Bottom 0.203: J4.4 65.28,80.52 v70.61,80.52
N$1
  Top 0.203: C4.2 8.89,3.81 7.49,5.33 7.49,9.4 7.75,9.65 8.51,9.65 8.87,9.29 ATMEGA328P-AU.20
N$2
  Top 0.203: R13.2 19.05,48.26 20.32,49.53 U1.D13
N$3
  Top 0.203: R12.2 20.32,48.26 U1.D12
N$4
  Top 0.203: R11.2 21.59,46.99 U1.D11
N$5
  Top 0.203: JP4.2 29.37,46.58 28.32,47.62 23.5,47.62 22.86,46.99 R10.2
N$6
  Top 0.203: JP4.1 30.48,48.26 U1.D10
N$7
  Top 0.203: JP3.1 U1.D8
N$8
  Top 0.203: C5.2 2.54,70.36 JP7.1
N$9
  Top 0.203: C6.2 8.89,57.66 7.49,59.18 7.49,63.25 7.75,63.5 8.51,63.5 8.87,63.14 ATMEGA328P-AU1.20
N$10
  Top 0.203: U$3.11 R17.1
N$11
  Top 0.203: U$1.11 R2.1
N$12
  Top 0.203: U$1.7 R3.1
N$13
  Top 0.203: C3.2 2.54,16.51 JP1.1
N$14
  Top 0.203: U$1.4 R4.1
N$15
  Top 0.203: R5.1 U$1.2
N$16
  Top 0.203: R6.1 U$1.1
N$17
  Top 0.203: U$1.10 R7.1
N$18
  Top 0.203: R8.1 U$1.5
N$19
  Top 0.203: R9.1 U$1.3
N$20
  Top 0.203: U$3.7 R18.1
N$21
  Top 0.203: U$3.4 R19.1
N$22
  Top 0.203: R20.1 U$3.2
N$23
  Top 0.203: R21.1 U$3.1
N$24
  Top 0.203: U$3.10 R22.1
N$25
  Top 0.203: R23.1 U$3.5
N$26
  Top 0.203: R24.1 U$3.3
N$27
  Top 0.203: R28.2 19.05,102.11 20.32,103.38 U2.D13
N$28
  Top 0.203: R27.2 20.32,102.11 U2.D12
N$29
  Top 0.203: R26.2 21.59,100.84 U2.D11
N$30
  Top 0.203: JP12.2 29.37,100.43 28.32,101.47 23.5,101.47 22.86,100.84 R25.2
N$31
  Top 0.203: JP12.1 30.48,102.11 U2.D10
N$32
  Top 0.203: JP11.1 U2.D8
N$33
  Top 0.203: C8.2 62.74,16.51 JP15.1
N$34
  Top 0.203: C9.2 69.09,3.81 67.69,5.33 67.69,9.4 67.94,9.65 68.71,9.65 69.07,9.29 ATMEGA328P-AU2.20
N$35
  Top 0.203: U$6.11 R32.1
N$36
  Top 0.203: U$6.7 R33.1
N$37
  Top 0.203: U$6.4 R34.1
N$38
  Top 0.203: R35.1 U$6.2
N$39
  Top 0.203: R36.1 U$6.1
N$40
  Top 0.203: U$6.10 R37.1
N$41
  Top 0.203: R38.1 U$6.5
N$42
  Top 0.203: R39.1 U$6.3
N$43
  Top 0.203: R43.2 79.25,48.26 80.52,49.53 U3.D13
N$44
  Top 0.203: R42.2 80.52,48.26 U3.D12
N$45
  Top 0.203: R41.2 81.79,46.99 U3.D11
N$46
  Top 0.203: JP18.2 89.57,46.58 88.52,47.62 83.69,47.62 83.06,46.99 R40.2
N$47
  Top 0.203: JP18.1 90.68,48.26 U3.D10
N$48
  Top 0.203: JP17.1 U3.D8
N$49
  Top 0.203: C11.2 62.74,70.36 JP21.1
N$50
  Top 0.203: C12.2 69.09,57.66 67.69,59.18 67.69,63.25 67.94,63.5 68.71,63.5 69.07,63.14 ATMEGA328P-AU3.20
N$51
  Top 0.203: U$8.11 R47.1
N$52
  Top 0.203: U$8.7 R48.1
N$53
  Top 0.203: U$8.4 R49.1
N$54
  Top 0.203: R50.1 U$8.2
N$55
  Top 0.203: R51.1 U$8.1
N$56
  Top 0.203: U$8.10 R52.1
N$57
  Top 0.203: R53.1 U$8.5
N$58
  Top 0.203: R54.1 U$8.3
N$59
  Top 0.203: R58.2 79.25,102.11 80.52,103.38 U4.D13
N$60
  Top 0.203: R57.2 80.52,102.11 U4.D12
N$61
  Top 0.203: R56.2 81.79,100.84 U4.D11
N$62
  Top 0.203: JP24.2 89.57,100.43 88.52,101.47 83.69,101.47 83.06,100.84 R55.2
N$63
  Top 0.203: JP24.1 90.68,102.11 U4.D10
N$64
  Top 0.203: JP23.1 U4.D8
RESET  (via drill 0.51)
  Top 0.203: ATMEGA328P-AU.29 14.37,3.79 v15.37,2.79 | v6.99,4.06 6.99,13.97 5.71,15.24 5.71,16.5 R1.1 | R1.1 C3.1 | R1.1 5.7,17.13 6.35,17.78 J1.5
  Bottom 0.203: v15.37,2.79 15.37,1.91 14.73,1.27 9.78,1.27 v6.99,4.06
RESET1  (via drill 0.51)
  Top 0.203: ATMEGA328P-AU1.29 14.37,57.64 v15.37,56.64 | v6.99,57.91 6.99,67.82 5.71,69.09 5.71,70.34 R16.1 | R16.1 C5.1 | R16.1 5.7,70.98 6.35,71.63 J2.5
  Bottom 0.203: v15.37,56.64 15.37,55.75 14.73,55.12 9.78,55.12 v6.99,57.91
RESET2  (via drill 0.51)
  Top 0.203: ATMEGA328P-AU2.29 74.57,3.79 v75.56,2.79 | v67.18,4.06 67.18,13.97 65.91,15.24 65.91,16.5 R31.1 | R31.1 C8.1 | R31.1 65.9,17.13 66.55,17.78 J3.5
  Bottom 0.203: v75.56,2.79 75.56,1.91 74.93,1.27 69.98,1.27 v67.18,4.06
RESET3  (via drill 0.51)
  Top 0.203: ATMEGA328P-AU3.29 74.57,57.64 v75.56,56.64 | v67.18,57.91 67.18,67.82 65.91,69.09 65.91,70.34 R46.1 | R46.1 C11.1 | R46.1 65.9,70.98 66.55,71.63 J4.5
  Bottom 0.203: v75.56,56.64 75.56,55.75 74.93,55.12 69.98,55.12 v67.18,57.91
RX  (via drill 0.51)
  Top 0.203: ATMEGA328P-AU.30 15.17,5.66 14.22,6.6 14.22,8.64 v15.24,9.65 | v54.61,21.59 JP2.1 54.61,46.99 53.34,48.26 35.56,48.26 33.88,46.58 JP3.2
  Bottom 0.203: v54.61,21.59 50.8,17.78 16.51,17.78 15.24,16.51 v15.24,9.65 15.11,9.53 4.95,9.53 4.32,10.16 JP1.3
RX1  (via drill 0.51)
  Top 0.203: ATMEGA328P-AU1.30 15.17,59.51 14.22,60.45 14.22,62.48 v15.24,63.5 | v54.61,75.44 JP8.1 54.61,100.84 53.34,102.11 35.56,102.11 33.88,100.43 JP11.2
  Bottom 0.203: v54.61,75.44 50.8,71.63 16.51,71.63 15.24,70.36 v15.24,63.5 15.11,63.37 4.95,63.37 4.32,64.01 JP7.3
RX2  (via drill 0.51)
  Top 0.203: ATMEGA328P-AU2.30 75.37,5.66 74.42,6.6 74.42,8.64 v75.44,9.65 | v114.81,21.59 JP16.1 114.81,46.99 113.54,48.26 95.76,48.26 94.08,46.58 JP17.2
  Bottom 0.203: v114.81,21.59 111,17.78 76.71,17.78 75.44,16.51 v75.44,9.65 75.31,9.53 65.15,9.53 64.52,10.16 JP15.3
RX3  (via drill 0.51)
  Top 0.203: ATMEGA328P-AU3.30 75.37,59.51 74.42,60.45 74.42,62.48 v75.44,63.5 | v114.81,75.44 JP22.1 114.81,100.84 113.54,102.11 95.76,102.11 94.08,100.43 JP23.2
  Bottom 0.203: v114.81,75.44 111,71.63 76.71,71.63 75.44,70.36 v75.44,63.5 75.31,63.37 65.15,63.37 64.52,64.01 JP21.3
SCK  (via drill 0.51)
  Top 0.203: ATMEGA328P-AU.17 9.68,16.1 8.38,17.4 v8.38,25.4 8.38,41.15 12.32,45.09 19.04,45.09 R13.1
  Bottom 0.203: J1.3 v8.38,25.4
SCK1  (via drill 0.51)
  Top 0.203: ATMEGA328P-AU1.17 9.68,69.95 8.38,71.25 v8.38,79.25 8.38,95 12.32,98.93 19.04,98.93 R28.1
  Bottom 0.203: J2.3 v8.38,79.25
SCK2  (via drill 0.51)
  Top 0.203: ATMEGA328P-AU2.17 69.88,16.1 68.58,17.4 v68.58,25.4 68.58,41.15 72.52,45.09 79.23,45.09 R43.1
  Bottom 0.203: J3.3 v68.58,25.4
SCK3  (via drill 0.51)
  Top 0.203: ATMEGA328P-AU3.17 69.88,69.95 68.58,71.25 v68.58,79.25 68.58,95 72.52,98.93 79.23,98.93 R58.1
  Bottom 0.203: J4.3 v68.58,79.25
SCL  (via drill 0.51)
  Top 0.203: U1.A5 53.34,1.27 v39.37,1.27 | v19.81,4.32 20.32,3.68 R15.1 20.94,3.19 v21.59,2.54 | v13.97,2.67 13.57,3.07 ATMEGA328P-AU.28
  Bottom 0.203: v19.81,4.32 15.62,4.32 v13.97,2.67 | v21.59,2.54 22.86,1.27 v39.37,1.27
SCL1  (via drill 0.51)
  Top 0.203: U2.A5 53.34,55.12 v39.37,55.12 | v19.81,58.17 20.32,57.53 R30.1 20.94,57.04 v21.59,56.39 | v13.97,56.52 13.57,56.91 ATMEGA328P-AU1.28
  Bottom 0.203: v19.81,58.17 15.62,58.17 v13.97,56.52 | v21.59,56.39 22.86,55.12 v39.37,55.12
SCL2  (via drill 0.51)
  Top 0.203: U3.A5 113.54,1.27 v99.57,1.27 | v80.01,4.32 80.52,3.68 R45.1 81.14,3.19 v81.79,2.54 | v74.17,2.67 73.77,3.07 ATMEGA328P-AU2.28
  Bottom 0.203: v80.01,4.32 75.82,4.32 v74.17,2.67 | v81.79,2.54 83.06,1.27 v99.57,1.27
SCL3  (via drill 0.51)
  Top 0.203: U4.A5 113.54,55.12 v99.57,55.12 | v80.01,58.17 80.52,57.53 R60.1 81.14,57.04 v81.79,56.39 | v74.17,56.52 73.77,56.91 ATMEGA328P-AU3.28
  Bottom 0.203: v80.01,58.17 75.82,58.17 v74.17,56.52 | v81.79,56.39 83.06,55.12 v99.57,55.12
SDA
  Top 0.203: U1.A4 50.8,3.81 21.84,3.81 20.32,5.21 19.18,5.21 17.78,3.81 R14.1 17.16,3.19 15.75,1.78 13.46,1.78 12.77,2.47 ATMEGA328P-AU.27
SDA1
  Top 0.203: U2.A4 50.8,57.66 21.84,57.66 20.32,59.05 19.18,59.05 17.78,57.66 R29.1 17.16,57.04 15.75,55.63 13.46,55.63 12.77,56.32 ATMEGA328P-AU1.27
SDA2
  Top 0.203: U3.A4 111,3.81 82.04,3.81 80.52,5.21 79.38,5.21 77.98,3.81 R44.1 77.36,3.19 75.95,1.78 73.66,1.78 72.97,2.47 ATMEGA328P-AU2.27
SDA3
  Top 0.203: U4.A4 111,57.66 82.04,57.66 80.52,59.05 79.38,59.05 77.98,57.66 R59.1 77.36,57.04 75.95,55.63 73.66,55.63 72.97,56.32 ATMEGA328P-AU3.27
TX  (via drill 0.51)
  Top 0.203: v16.51,11.43 v20.32,15.24 | ATMEGA328P-AU.31 15.97,6 15.24,6.73 v15.24,8 | JP1.2 1.91,12.7 3.81,10.79 v3.81,8.38 | v52.07,16.51 JP2.2
  Bottom 0.203: v20.32,15.24 50.8,15.24 v52.07,16.51 | v16.51,11.43 16.51,9.27 v15.24,8 4.19,8 v3.81,8.38
TX1  (via drill 0.51)
  Top 0.203: v16.51,65.28 v20.32,69.09 | ATMEGA328P-AU1.31 15.97,59.85 15.24,60.58 v15.24,61.85 | JP7.2 1.91,66.55 3.81,64.64 v3.81,62.23 | v52.07,70.36 JP8.2
  Bottom 0.203: v20.32,69.09 50.8,69.09 v52.07,70.36 | v16.51,65.28 16.51,63.12 v15.24,61.85 4.19,61.85 v3.81,62.23
TX2  (via drill 0.51)
  Top 0.203: v76.71,11.43 v80.52,15.24 | ATMEGA328P-AU2.31 76.17,6 75.44,6.73 v75.44,8 | JP15.2 62.1,12.7 64.01,10.79 v64.01,8.38 | v112.27,16.51 JP16.2
  Bottom 0.203: v80.52,15.24 111,15.24 v112.27,16.51 | v76.71,11.43 76.71,9.27 v75.44,8 64.39,8 v64.01,8.38
TX3  (via drill 0.51)
  Top 0.203: v76.71,65.28 v80.52,69.09 | ATMEGA328P-AU3.31 76.17,59.85 75.44,60.58 v75.44,61.85 | JP21.2 62.1,66.55 64.01,64.64 v64.01,62.23 | v112.27,70.36 JP22.2
  Bottom 0.203: v80.52,69.09 111,69.09 v112.27,70.36 | v76.71,65.28 76.71,63.12 v75.44,61.85 64.39,61.85 v64.01,62.23
VCC  (via drill 0.38, 0.51)
  Top 0.203: ATMEGA328P-AU.6 18.33,10.16 C1.1 22.21,9.54 22.86,8.89 v24.13,8.89 | ATMEGA328P-AU.6 16.58,10.09 14.73,11.94 11.68,11.94 10.67,10.92 9.71,10.92 ATMEGA328P-AU.18 8.79,10.89 v8.38,11.3 8.38,15.49 7.37,16.51 R1.2 7,18.94 v7.37,19.3 | R15.2 R14.2 17.78,1.27 18.16,0.89 27.56,0.89 U1.5V | ATMEGA328P-AU.6 19.12,10.09 19.43,9.78 19.43,8.89 19.05,8.51 18.28,8.51 ATMEGA328P-AU.4 | v5.08,11.3 5.08,7.62 3.81,6.35 2.54,6.35 JP1.4 | J1.2 2.54,26.67 2.54,21.59 v3.81,20.32
  Bottom 0.203: v24.13,8.89 27.94,8.89 29.21,7.62 U1.5V | v8.38,11.3 v5.08,11.3 | v3.81,20.32 6.35,20.32 v7.37,19.3
VCC1  (via drill 0.38, 0.51)
  Top 0.203: ATMEGA328P-AU1.6 18.33,64.01 C2.1 22.21,63.39 22.86,62.74 v24.13,62.74 | ATMEGA328P-AU1.6 16.58,63.94 14.73,65.79 11.68,65.79 10.67,64.77 9.71,64.77 ATMEGA328P-AU1.18 8.79,64.74 v8.38,65.15 8.38,69.34 7.37,70.36 R16.2 7,72.79 v7.37,73.15 | R30.2 R29.2 17.78,55.12 18.16,54.74 27.56,54.74 U2.5V | ATMEGA328P-AU1.6 19.12,63.94 19.43,63.63 19.43,62.74 19.05,62.36 18.28,62.36 ATMEGA328P-AU1.4 | v5.08,65.15 5.08,61.47 3.81,60.2 2.54,60.2 JP7.4 | J2.2 2.54,80.52 2.54,75.44 v3.81,74.17
  Bottom 0.203: v24.13,62.74 27.94,62.74 29.21,61.47 U2.5V | v8.38,65.15 v5.08,65.15 | v3.81,74.17 6.35,74.17 v7.37,73.15
VCC2  (via drill 0.38, 0.51)
  Top 0.203: ATMEGA328P-AU2.6 78.53,10.16 C7.1 82.41,9.54 83.06,8.89 v84.33,8.89 | ATMEGA328P-AU2.6 76.78,10.09 74.93,11.94 71.88,11.94 70.87,10.92 69.91,10.92 ATMEGA328P-AU2.18 68.99,10.89 v68.58,11.3 68.58,15.49 67.56,16.51 R31.2 67.2,18.94 v67.56,19.3 | R45.2 R44.2 77.98,1.27 78.36,0.89 87.76,0.89 U3.5V | ATMEGA328P-AU2.6 79.32,10.09 79.63,9.78 79.63,8.89 79.25,8.51 78.48,8.51 ATMEGA328P-AU2.4 | v65.28,11.3 65.28,7.62 64.01,6.35 62.74,6.35 JP15.4 | J3.2 62.74,26.67 62.74,21.59 v64.01,20.32
  Bottom 0.203: v84.33,8.89 88.14,8.89 89.41,7.62 U3.5V | v68.58,11.3 v65.28,11.3 | v64.01,20.32 66.55,20.32 v67.56,19.3
VCC3  (via drill 0.38, 0.51)
  Top 0.203: ATMEGA328P-AU3.6 78.53,64.01 C10.1 82.41,63.39 83.06,62.74 v84.33,62.74 | ATMEGA328P-AU3.6 76.78,63.94 74.93,65.79 71.88,65.79 70.87,64.77 69.91,64.77 ATMEGA328P-AU3.18 68.99,64.74 v68.58,65.15 68.58,69.34 67.56,70.36 R46.2 67.2,72.79 v67.56,73.15 | R60.2 R59.2 77.98,55.12 78.36,54.74 87.76,54.74 U4.5V | ATMEGA328P-AU3.6 79.32,63.94 79.63,63.63 79.63,62.74 79.25,62.36 78.48,62.36 ATMEGA328P-AU3.4 | v65.28,65.15 65.28,61.47 64.01,60.2 62.74,60.2 JP21.4 | J4.2 62.74,80.52 62.74,75.44 v64.01,74.17
  Bottom 0.203: v84.33,62.74 88.14,62.74 89.41,61.47 U4.5V | v68.58,65.15 v65.28,65.15 | v64.01,74.17 66.55,74.17 v67.56,73.15

## Text on the board
Bottom: v10 | v10 | v10 | v10
Dimension: route out
tPlace: RX | RX | Red | Grn | Wht | Ylw | Blu | Red | Grn | Wht | Ylw | Blu | Color | !CS | Color | !CS | RST | RST | TX | TX | 7 Segment Shield | 7 Segment Shield | RX | RX | VCC | VCC | GND | GND | GND | GND | Red | Grn | Wht | Ylw | Blu | RX | Red | Grn | Wht | Ylw | Blu | RX | Color | !CS | Color | !CS | RST | RST | TX | TX | 7 Segment Shield | 7 Segment Shield | RX | RX | VCC | VCC | GND | GND | GND | GND